# Altium PCB SoM.PcbDoc (part 5 of 5)
Units mm, origin at the board's own origin, x right, y up, seen from the top; angles counter-clockwise.
Board outline 69.6 x 50 mm, 8 copper layers ([1] Signal HS-H, [2] GND, [3] Signal HS-V, [4] GND, [5] POWER, [6] Signal H, [7] GND, [8] Signal V), stack 1.601 mm thick; 537 components, 538 nets, 5734 pads, 0 vias.
Unrouted connection lines stored in the file: 2195.
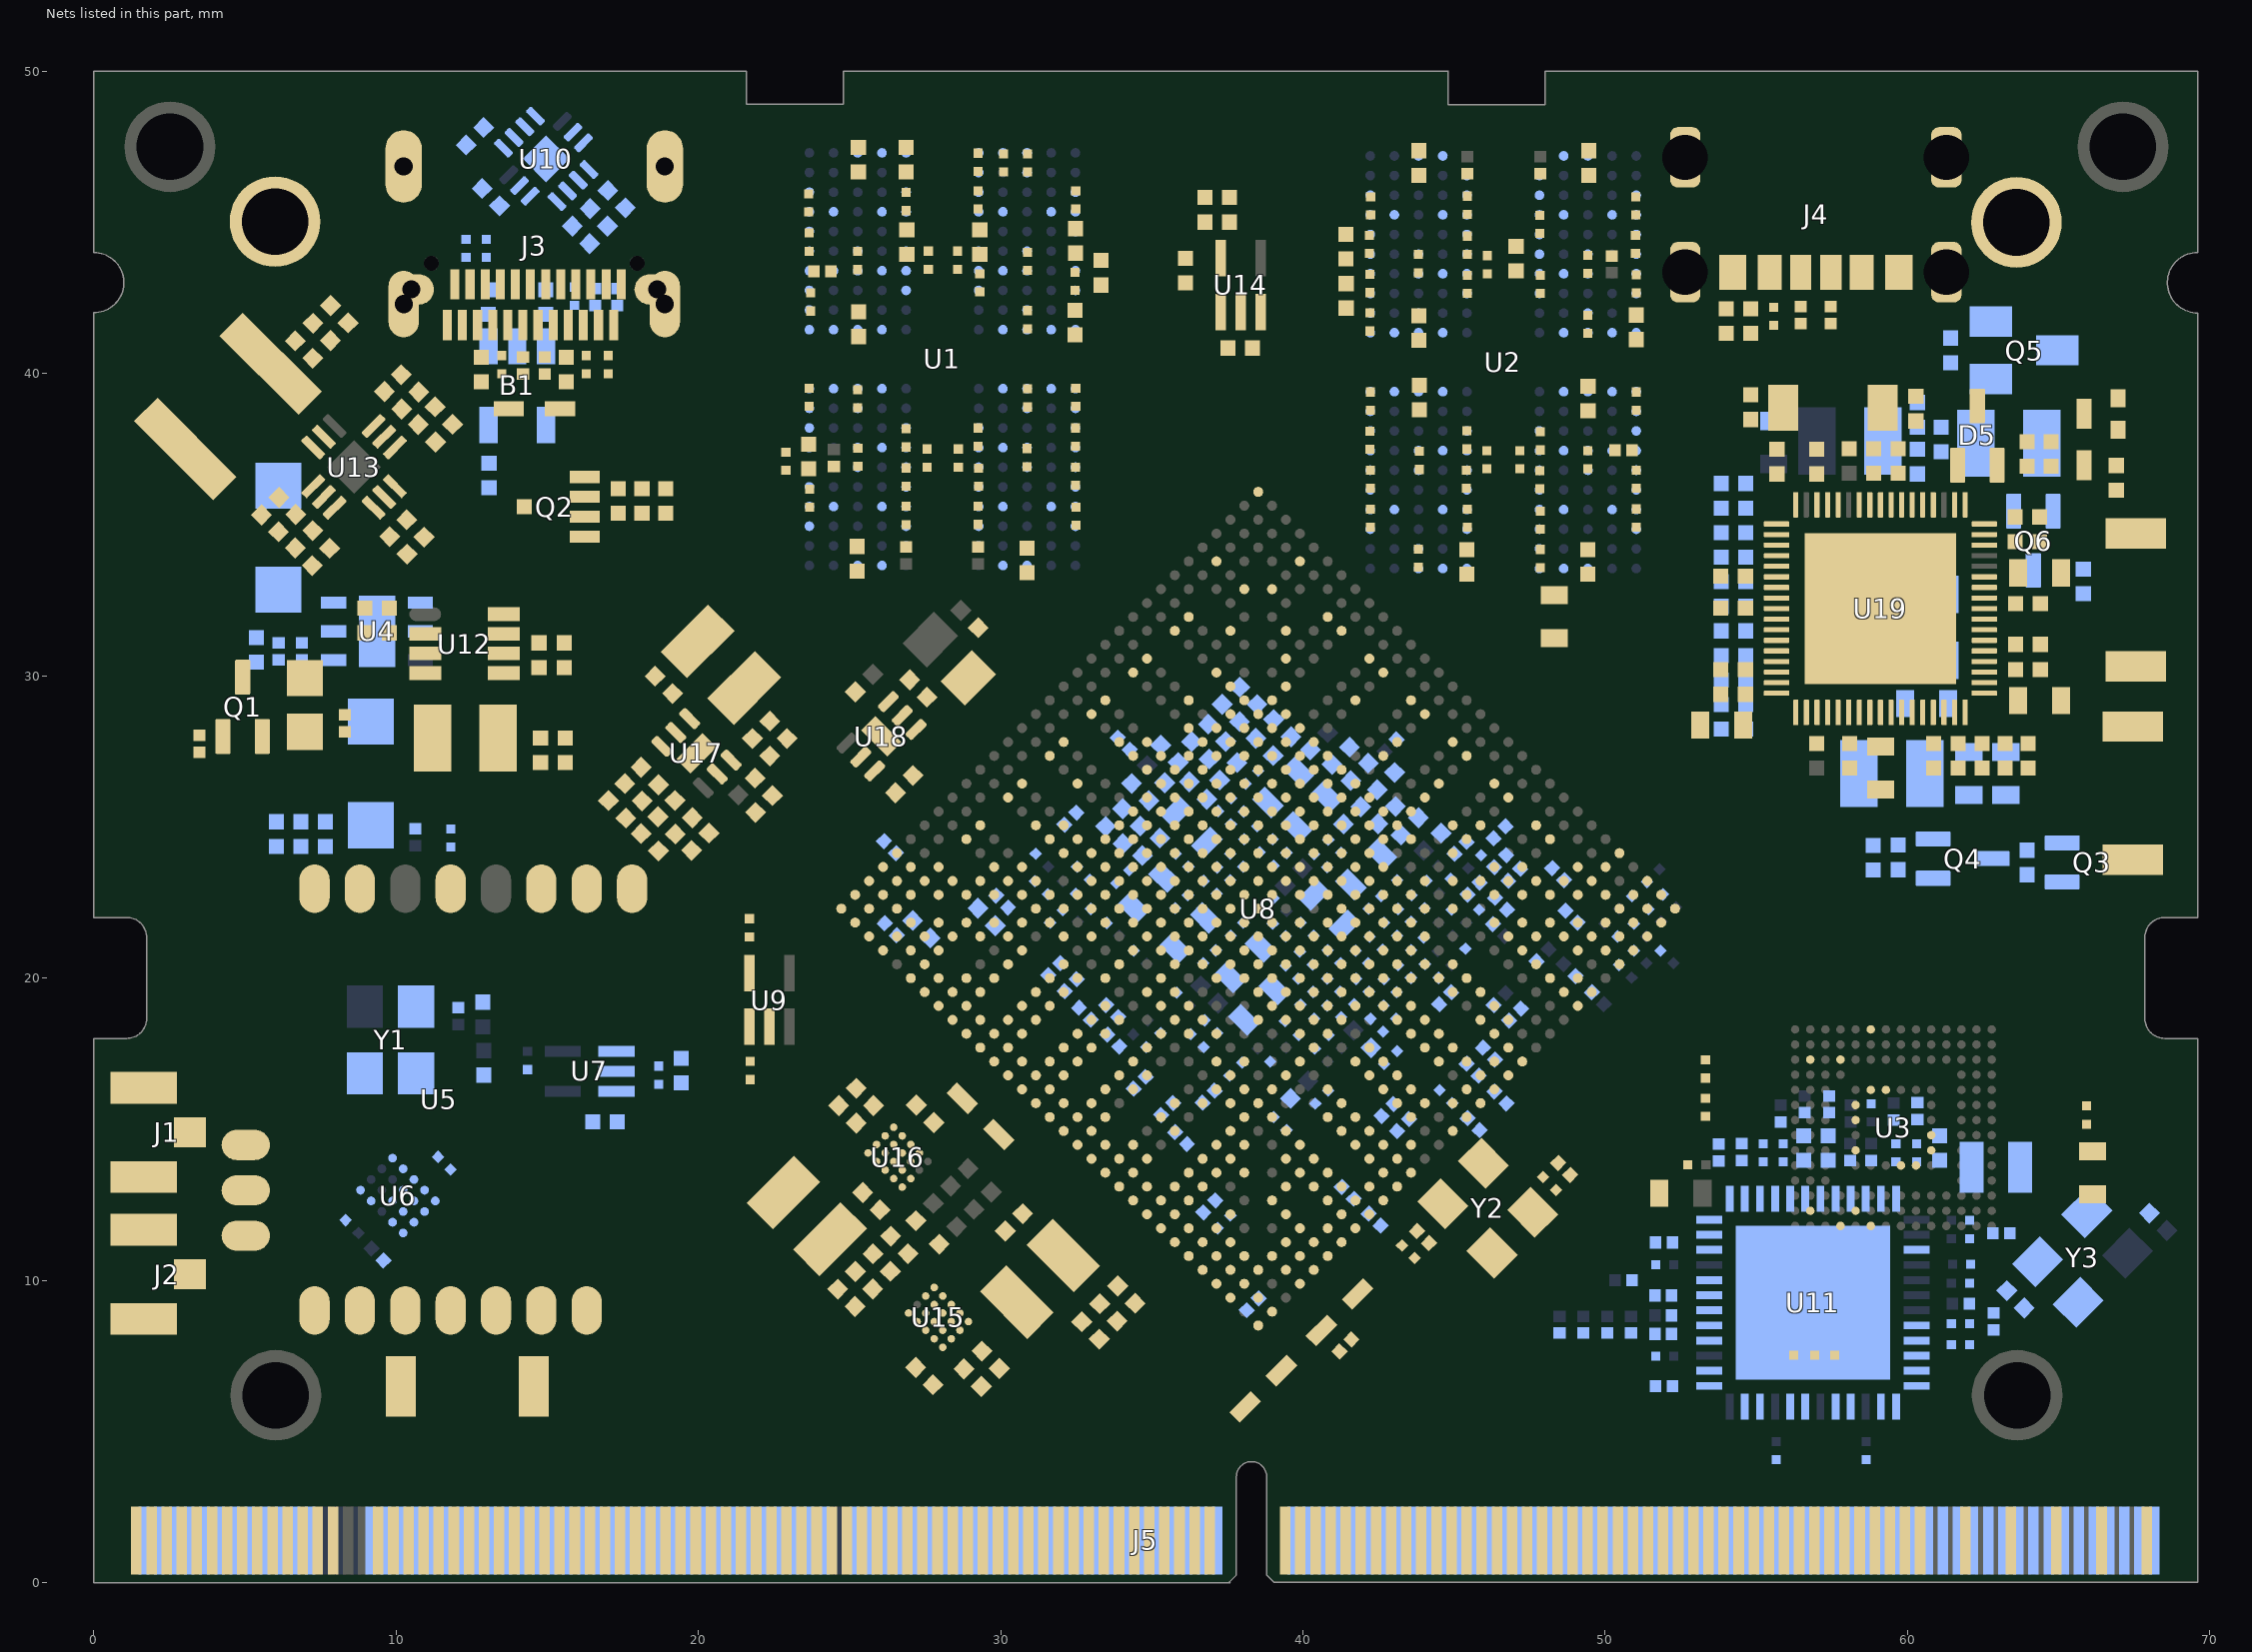
[diagram p11: the nets of this part, all layers, seen from the top]

## Nets (pads, with @x,y where several pads share a name; then routed paths per layer and width w, separated by ;. In a path a pad name is that pad's centre, name@x,y a point inside that pad or via, vN(x,y) a via of type N, cw(c..) or ccw(c..) an arc to the next point about the centre after c; other vN are vias at no path point) (continued)
GND: B1.2 C1.1 C2.1 C3.1 C4.1 C5.1 C6.1 C7.1 C8.1 C9.1 C10.1 C11.1 C12.1 C13.1 C14.1 C15.1 C16.1 C17.1 C18.1 C19.1 C20.1 C21.1 C22.1 C23.1 C24.1 C25.1 C26.1 C27.1 C28.1 C29.1 C30.1 C31.1 C32.1 C33.1 C34.1 C35.1 C36.1 C37.1 C38.1 C39.1 C40.1 C41.1 C42.1 C43.1 C44.1 C45.1 C46.1 C47.1 C48.1 C49.1 C50.1 C51.1 C52.1 C53.1 C54.1 C55.1 C56.1 C57.1 C58.1 C59.1 C60.1 C61.1 C62.1 C63.1 C64.1 C65.1 C66.1 C67.1 C68.1 C69.1 C70.1 C71.1 C72.1 C73.1 C74.1 C75.1 C76.1 C77.1 C78.1 C79.1 C80.1 C81.1 C82.1 C83.1 C84.1 C85.1 C86.1 C87.1 C88.1 C89.1 C90.1 C91.2 C92.2 C93.1 C94.1 C95.1 C96.2 C97.1 C98.1 C99.1 C100.1 C101.1 C102.1 C103.1 C104.1 C105.1 C106.1 C107.1 C108.1 C109.1 C110.1 C111.1 C112.1 C113.1 C114.1 C116.1 C117.1 C118.1 C119.1 C120.1 C121.1 C122.1 C123.1 C124.1 C125.1 C126.1 C127.1 C128.1 C129.1 C130.1 C131.1 C132.1 C133.1 C134.1 C135.1 C136.1 C137.1 C138.1 C139.1 C140.1 C141.1 C142.1 C143.1 C144.1 C145.1 C146.1 C154.1 C155.1 C156.1 C157.1 C158.1 C159.1 C160.1 C161.1 C162.1 C163.1 C164.1 C165.1 C166.1 C167.1 C168.1 C169.1 C170.1 C171.1 C172.1 C173.1 C174.1 C175.1 C176.1 C177.1 C178.1 C179.1 C180.1 C181.1 C182.1 C183.1 C184.1 C185.1 C186.1 C187.1 C188.1 C189.1 C190.1 C191.1 C192.1 C193.1 C194.1 C203.1 C204.1 C205.1 C206.1 C207.1 C208.1 C209.1 C210.1 C211.1 C212.1 C213.1 C214.1 C215.1 C216.1 C217.1 C218.1 C219.1 C220.1 C221.1 C222.1 C223.1 C224.1 C225.1 C226.1 C227.1 C228.1 C229.1 C230.1 C231.1 C232.1 C233.2 C234.1 C235.1 C236.1 C241.1 C243.1 C245.1 C246.1 C247.1 C248.1 C249.1 C250.1 C251.1 C252.1 C253.1 C254.1 C255.1 C256.1 C257.1 C258.1 C259.1 C260.1 C261.1 C262.1 C263.1 C264.1 C265.1 C266.1 C267.1 C268.1 C270.1 C271.1 C272.1 C273.1 C274.1 C275.1 C277.1 C278.1 C279.1 C280.1 C281.1 C282.1 C283.1 C284.1 C285.1 C286.1 C287.1 C288.1 C289.1 C290.1 C291.1 C292.1 C293.1 C294.1 C295.1 C296.1 C297.1 C298.1 C299.1 C300.1 C301.1 C302.1 C303.1 C304.1 C305.1 C306.1 C307.1 C308.1 C309.1 C310.1 C311.1 C312.1 C313.1 C314.1 C315.1 C316.1 C317.1 C318.1 C319.1 C320.1 C322.1 C323.1 C324.1 C325.1 C326.1 C327.1 C328.2 C329.1 C330.1 C331.1 C332.1 C333.1 C334.1 C335.1 C336.1 C337.1 C338.1 C339.1 C340.1 C341.2 C342.1 C343.2 C344.1 C345.1 C346.1 C347.1 D1.A D2.A D3.A D4.A D7.A J1.1 J1.3 J2.1 J2.3 J3.A1 J3.A12 J3.B1 J3.B12 J3.S1 J3.S2 J3.S3 J3.S4 J4.A12 J4.B12 J4.E1 J4.E2 J4.E3 J4.E4 J5.9 J5.10 J5.11 J5.12 J5.24 J5.32 J5.35 J5.51 J5.64 J5.65 J5.74 J5.83 J5.86 J5.87 J5.92 J5.96 J5.109 J5.110 J5.113 J5.114 J5.119 J5.120 J5.125 J5.126 J5.131 J5.132 J5.137 J5.138 J5.143 J5.144 J5.146 J5.149 J5.152 J5.155 J5.158 J5.161 J5.164 J5.167 J5.170 J5.173 J5.176 J5.179 J5.182 J5.185 J5.188 J5.191 J5.194 J5.197 J5.200 J5.203 J5.206 J5.209 J5.212 J5.217 J5.218 J5.223 J5.224 J5.229 J5.230 J5.235 J5.236 J5.241 J5.242 J5.247 J5.248 J5.253 J5.254 J5.259 J5.260 pad.1@6,45.025 pad.1@63.6,45 Q1.2 Q4.2 Q6.2 R2.1 R6.1 R13.2 R17.1 R18.2 R19.1 R20.1 R26.1 R28.2 R29.2 R30.1 R31.2 R32.2 R33.2 R34.2 R35.2 R37.2 R39.2 R40.2 R41.2 R52.1 R53.1 R64.2 R65.1 R66.1 R75.1 R81.1 R83.1 R85.1 R87.1 R95.1 R99.1 R101.1 R102.1 R103.1 R114.1 R115.1 R116.1 R120.1 R121.1 R131.1 SW2.1 SW3.1 U1.A3 U1.A10 U1.AB3 U1.AB5 U1.AB8 U1.AB10 U1.C1 U1.C5 U1.C8 U1.C12 U1.D2 U1.D4 U1.D9 U1.D11 U1.E1 U1.E5 U1.E8 U1.E12 U1.G1 U1.G3 U1.G5 U1.G8 U1.G10 U1.G12 U1.J1 U1.J3 U1.J10 U1.J12 U1.K2 U1.K4 U1.K9 U1.K11 U1.N2 U1.N4 U1.N9 U1.N11 U1.P1 U1.P3 U1.P10 U1.P12 U1.T1 U1.T3 U1.T5 U1.T8 U1.T10 U1.T12 U1.V1 U1.V5 U1.V8 U1.V12 U1.W2 U1.W4 U1.W9 U1.W11 U1.Y1 U1.Y5 U1.Y8 U1.Y12 U2.A3 U2.A10 U2.AB3 U2.AB5 U2.AB8 U2.AB10 U2.C1 U2.C5 U2.C8 U2.C12 U2.D2 U2.D4 U2.D9 U2.D11 U2.E1 U2.E5 U2.E8 U2.E12 U2.G1 U2.G3 U2.G5 U2.G8 U2.G10 U2.G12 U2.J1 U2.J3 U2.J10 U2.J12 U2.K2 U2.K4 U2.K9 U2.K11 U2.N2 U2.N4 U2.N9 U2.N11 U2.P1 U2.P3 U2.P10 U2.P12 U2.T1 U2.T3 U2.T5 U2.T8 U2.T10 U2.T12 U2.V1 U2.V5 U2.V8 U2.V12 U2.W2 U2.W4 U2.W9 U2.W11 U2.Y1 U2.Y5 U2.Y8 U2.Y12 U3.A6 U3.C4 U3.E7 U3.G5 U3.H10 U3.J5 U3.K8 U3.N2 U3.N5 U3.P4 U3.P6 U4.2 U4.7 U5.5 U5.7 U5.8 U5.10 U5.14 U6.D1 U7.2 U8.A1 U8.A27 U8.A31 U8.AA3 U8.AA5 U8.AA9 U8.AA10 U8.AA11 U8.AA12 U8.AA13 U8.AA14 U8.AA15 U8.AA23 U8.AA26 U8.AA29 U8.AB9 U8.AB10 U8.AB11 U8.AB13 U8.AB15 U8.AB16 U8.AB17 U8.AB19 U8.AB23 U8.AC3 U8.AC11 U8.AC13 U8.AC15 U8.AC16 U8.AC17 U8.AC18 U8.AC20 U8.AC21 U8.AC22 U8.AC23 U8.AC25 U8.AC26 U8.AC29 U8.AD3 U8.AD5 U8.AD10 U8.AD13 U8.AD17 U8.AD21 U8.AD22 U8.AD26 U8.AD29 U8.AE11 U8.AE12 U8.AE14 U8.AE17 U8.AE23 U8.AE27 U8.AF9 U8.AF17 U8.AF18 U8.AF20 U8.AF23 U8.AF24 U8.AF29 U8.AG2 U8.AG29 U8.AH29 U8.AJ5 U8.AJ6 U8.AJ8 U8.AJ9 U8.AJ11 U8.AJ12 U8.AJ14 U8.AJ15 U8.AJ17 U8.AJ18 U8.AJ20 U8.AJ21 U8.AJ23 U8.AJ24 U8.AJ26 U8.AJ27 U8.AJ28 U8.AJ29 U8.AL1 U8.AL31 U8.B5 U8.B31 U8.C8 U8.C9 U8.C11 U8.C12 U8.C14 U8.C15 U8.C17 U8.C18 U8.C20 U8.C21 U8.C23 U8.C24 U8.C26 U8.C28 U8.C29 U8.D5 U8.D29 U8.E2 U8.E4 U8.E7 U8.E12 U8.E15 U8.E18 U8.E21 U8.E24 U8.E31 U8.F8 U8.F15 U8.F18 U8.F20 U8.F21 U8.G5 U8.G9 U8.G18 U8.G27 U8.H3 U8.H9 U8.H10 U8.H11 U8.H12 U8.H13 U8.H15 U8.H16 U8.H17 U8.H18 U8.H19 U8.H26 U8.J3 U8.J6 U8.J7 U8.J8 U8.J9 U8.J10 U8.J21 U8.K8 U8.K9 U8.K10 U8.K12 U8.K14 U8.K16 U8.K18 U8.K20 U8.K22 U8.L3 U8.L6 U8.L8 U8.L11 U8.L12 U8.L13 U8.L14 U8.L15 U8.L16 U8.L20 U8.L22 U8.L27 U8.M3 U8.M8 U8.M10 U8.M16 U8.M23 U8.N8 U8.N13 U8.N14 U8.N15 U8.N16 U8.N17 U8.N19 U8.N21 U8.P3 U8.P6 U8.P7 U8.P8 U8.P10 U8.P11 U8.P12 U8.P16 U8.P17 U8.P19 U8.P21 U8.R3 U8.R5 U8.R6 U8.R14 U8.R15 U8.R16 U8.R18 U8.R21 U8.R23 U8.T8 U8.T10 U8.T16 U8.T18 U8.T19 U8.T21 U8.U3 U8.U8 U8.U11 U8.U12 U8.U14 U8.U15 U8.U16 U8.U19 U8.U21 U8.U22 U8.U23 U8.U29 U8.V3 U8.V5 U8.V8 U8.V10 U8.V17 U8.V23 U8.W8 U8.W9 U8.W13 U8.W17 U8.W18 U8.W19 U8.W21 U8.W22 U8.W23 U8.W30 U8.Y3 U8.Y9 U8.Y10 U8.Y11 U8.Y12 U8.Y13 U8.Y14 U8.Y15 U8.Y16 U8.Y17 U8.Y20 U8.Y23 U8.Y29 U9.2 U10.9 U10.15 U11.47 U11.49 U12.4 U12.6 U13.2 U13.10 U14.2 U15.B2 U15.B3 U15.B4 U15.C1 U15.C2 U15.C3 U15.C4 U16.B2 U16.B3 U16.B4 U16.C1 U16.C2 U16.C3 U16.C4 U17.5 U17.7 U18.5 U18.7 U19.21 U19.22 U19.27 U19.28 U19.30 U19.38 U19.40 U19.41 U19.46 U19.57 U19.62 U19.64 U19.69 Y1.2 Y2.2 Y2.4 Y3.2 Y3.4
GPIO0_A2: J5.37 U8.N24
GPIO0_A6/PWM3A_IR: J5.49 U8.P25
GPIO0_B5/LED1_OUT: R93.1 U8.P24
GPIO1_A0: J5.34 U8.R25
GPIO1_A1: J5.36 U8.T31
GPIO1_A2_CC_INT_L: U8.R26 U10.5
GPIO1_A3: J5.38 U8.R27
GPIO1_A4: J5.40 U8.R28
GPIO1_B5_TP_RST: J5.82 U8.M24
GPIO1_C2: J5.42 U8.N31
GPIO1_C4_TP_INT: J5.84 U8.M29
GPIO1_C6: J5.44 U8.L25
GPIO1_C7: J5.46 U8.M31
GPIO1_D0: J5.48 U8.L26
GPIO2_A2: J5.39 U8.H30
GPIO2_A3: J5.41 U8.F28
GPIO2_A4: J5.43 U8.H29
GPIO2_A5: J5.45 U8.F29
GPIO2_A6: J5.47 U8.H27
GPIO2_B3_CIF_CLKOUTA: J5.111 U8.H31
GPIO4_C0/I2C3_SDA: J5.68 U8.AG6
GPIO4_C1/I2C3_SCL: J5.66 U8.AL2
GPIO4_C5/SPDIF_TX: J5.50 U8.AK1
GPIO4_C6/PWM1: J5.90 U8.AL3
GPIO4_D0_PCB0: R47.1 R52.2 U8.AE6
GPIO4_D1_PCB1: R48.1 R53.2 U8.AK4
GPIO4_D2: B1.4 U8.AH3
GPIO4_D5_LCD_BL_EN: J5.78 U8.AJ3
GPIO4_D6_LCD_RST_H: J5.80 U8.AG4
GPU_SLEEP: U8.M25 U15.A1
H14_U8D: FB5.1 U8.H14
HDMI_CEC: J5.145 U8.AD7
HDMI_HPD: D1.K J5.147 R30.2 U8.AE15
HDMI_TX0_N: J5.157 U8.AL17
HDMI_TX0_P: J5.159 U8.AK17
HDMI_TX1_N: J5.163 U8.AL18
HDMI_TX1_P: J5.165 U8.AK18
HDMI_TX2_N: J5.169 U8.AL19
HDMI_TX2_P: J5.171 U8.AK19
HDMI_TXCLK_N: J5.151 U8.AL16
HDMI_TXCLK_P: J5.153 U8.AK16
HOST0_D_N: J5.221 U8.AB31
HOST0_D_P: J5.219 U8.AB30
HOST1_D_N: J5.227 U8.AA31
HOST1_D_P: J5.225 U8.AA30
HP_DET_H: J5.76 U8.AH5
I2C1_SCL: J5.53 R62.1 U8.Y6
I2C1_SDA: J5.55 R61.1 U8.AG1
I2C2_SCL: J5.59 R43.1 U8.H25
I2C2_SDA: J5.57 R42.1 U8.G31
I2C4_TPSCL: J5.70 R59.1 U8.P30 U10.6
I2C4_TPSDA: J5.72 R60.1 U8.P31 U10.7
I2C7_SCL_HDMI: J5.61 R45.1 U8.H28
I2C7_SDA_HDMI: J5.63 R44.1 U8.G30
I2C_SCL_PMIC: R57.1 U8.N30 U15.A3 U16.A3 U19.19
I2C_SDA_PMIC: R58.1 U8.M26 U15.B1 U16.B1 U19.18
I2S0_LRCK_RX: J5.69 U8.AF4
I2S0_LRCK_TX: J5.71 U8.AJ2
I2S0_SCLK: J5.67 U8.AG3
I2S0_SDI0: J5.73 U8.Y7
I2S0_SDI1SDO3: J5.75 U8.AE5
I2S0_SDI2SDO2: J5.77 U8.AA6
I2S0_SDI3SDO1: J5.79 U8.AH2
I2S0_SDO0: J5.81 U8.AH1
I2S1_LRCK_RX: J5.91 U8.AA7
I2S1_LRCK_TX: J5.93 U8.AJ1
I2S1_SCLK: J5.89 U8.AF3
I2S1_SDI0: J5.95 U8.AD6
I2S1_SDO0: J5.97 U8.AC6
I2S_CLK: J5.85 U8.AC7
LAN_LED0_AD0: J5.232 R80.1 U11.34
LAN_LED0_AD1: J5.234 R83.2 U11.35
LDO: C284.2 U13.6 U14.1 U14.3
LED2_RXDLY: R85.2 R86.1 U11.32
LOG_DVS_PWM: R117.1 R119.2 U8.M28
M7_U8E: FB4.1 U8.M7
MAC_COL: R84.1 U8.D27 U11.33
MAC_CRS: C255.2 R73.1 U8.B27 U11.29
MAC_MCLK: R54.2 R74.1
MAC_MDC: U8.E29 U11.30
MAC_MDIO: R71.1 U8.G26 U11.31
MAC_RXCLK: R76.1 U8.F25
MAC_RXD0: R88.1 U8.E26 U11.14
MAC_RXD1: R81.2 R82.1 U8.F27 U11.16
MAC_RXD2: R89.1 U8.E30 U11.17
MAC_RXD3: R91.1 U8.E25 U11.18
MAC_RXDV: R87.2 U8.C27 U11.13
MAC_RXER: R72.1 U8.F23 U11.20
MAC_TXCLK: R56.2 R79.1
MAC_TXD0: R50.2 U11.23
MAC_TXD1: R51.1 U11.24
MAC_TXD2: R46.2 U11.25
MAC_TXD3: R49.1 U11.26
MAC_TXEN: R55.1 U11.27
MDI0_N: J5.256 U11.2
MDI0_P: J5.258 U11.1
MDI1_N: J5.250 U11.5
MDI1_P: J5.252 U11.4
MDI2_N: J5.244 U11.8
MDI2_P: J5.246 U11.7
MDI3_N: J5.238 U11.11
MDI3_P: J5.240 U11.10
MIPI_CSI0_PWM: J5.101 U8.AF8
MIPI_CSI0_RST: J5.99 U8.AD9
MIPI_CSI1_PWN: J5.105 U8.V26
MIPI_CSI1_RST: J5.103 U8.U28
MIPI_RX0_CLK_N: J5.127 U8.AL13
MIPI_RX0_CLK_P: J5.129 U8.AK13
MIPI_RX0_D0_N: J5.139 U8.AL15
MIPI_RX0_D0_P: J5.141 U8.AK15
MIPI_RX0_D1_N: J5.133 U8.AL14
MIPI_RX0_D1_P: J5.135 U8.AK14
MIPI_RX0_D2_N: J5.121 U8.AL12
MIPI_RX0_D2_P: J5.123 U8.AK12
MIPI_RX0_D3_N: J5.115 U8.AL11
MIPI_RX0_D3_P: J5.117 U8.AK11
MIPI_TX0_CLK_N: J5.160 U8.AH12
MIPI_TX0_CLK_P: J5.162 U8.AG12
MIPI_TX0_D0_N: J5.172 U8.AH15
MIPI_TX0_D0_P: J5.174 U8.AG15
MIPI_TX0_D1_N: J5.166 U8.AH14
MIPI_TX0_D1_P: J5.168 U8.AG14
MIPI_TX0_D2_N: J5.154 U8.AH11
MIPI_TX0_D2_P: J5.156 U8.AG11
MIPI_TX0_D3_N: J5.148 U8.AH9
MIPI_TX0_D3_P: J5.150 U8.AG9
MIPI_TX1/RX1_CLK_N: J5.128 U8.AL8
MIPI_TX1/RX1_CLK_P: J5.130 U8.AK8
MIPI_TX1/RX1_D0_N: J5.116 U8.AL6
MIPI_TX1/RX1_D0_P: J5.118 U8.AK6
MIPI_TX1/RX1_D1_N: J5.122 U8.AL7
MIPI_TX1/RX1_D1_P: J5.124 U8.AK7
MIPI_TX1/RX1_D2_N: J5.134 U8.AL9
MIPI_TX1/RX1_D2_P: J5.136 U8.AK9
MIPI_TX1/RX1_D3_N: J5.140 U8.AL10
MIPI_TX1/RX1_D3_P: J5.142 U8.AK10
NetB1_1: B1.1 R64.1
NetC92_1: C92.1 R10.1 U5.12
NetC180_2: C180.2 R23.1 Y2.3
NetC191_2: C191.2 R27.1 U8.AH26
NetC195_1: C195.1 U8.B29
NetC196_1: C196.1 U8.A29
NetC197_1: C197.1 U8.B30
NetC198_1: C198.1 U8.A30
NetC199_1: C199.1 U8.C30
NetC200_1: C200.1 U8.C31
NetC201_1: C201.1 U8.D30
NetC202_1: C202.1 U8.D31
NetC237_2: C237.2 J3.A3
NetC238_2: C238.2 J3.A2
NetC239_2: C239.2 J3.B3
NetC240_2: C240.2 J3.B2
NetC252_2: C252.2 C253.2 R69.1
NetC264_2: C264.2 R90.1 Y3.3
NetC269_1: C269.1 L3.1 U13.7
NetC269_2: C269.2 R96.2
NetC273_2: C273.2 C274.2 C275.2 Q2.5 R98.2 U13.1
NetC276_2: C276.2 Q2.4 R97.2 R99.2
NetC280_2: C280.2 R104.1 U13.9
NetC303_2: C303.2 R109.2 U17.2
NetC306_2: C306.2 R117.2 R118.1 R120.2
NetC319_2: C319.2 C320.2 L9.1 U19.39
NetC321_1: C321.1 R121.2 R122.1 U19.56
NetC322_2: C322.2 C323.2 L11.1 U19.29
NetC328_1: C328.1 U19.37
NetC341_1: C341.1 U19.65 Y4.2
NetC343_1: C343.1 R123.2 Y4.1
NetD2_K: D2.K R36.1 U8.AK30
NetD3_K: D3.K R38.1 U8.AK31
NetDS1_A: DS1.A R92.1
NetDS1_K: DS1.K Q1.3
NetJ1_2: J1.2 U5.9
NetJ2_2: J2.2 U5.6
NetJ4_A5: J4.A5 R101.2
NetJ4_B5: J4.B5 R102.2
NetL1_1: L1.1 U11.48
NetL2_1: L2.1 U12.3
NetL4_1: L4.1 U15.D3 U15.D4 U15.E3 U15.E4
NetL5_1: L5.1 U16.D3 U16.D4 U16.E3 U16.E4
NetL6_1: L6.1 U17.4
NetL7_1: L7.1 U18.4
NetL8_1: L8.1 U19.61
NetL9_2: L9.2 U19.42 U19.43
NetL10_1: L10.1 U19.58
NetL11_2: L11.2 U19.25 U19.26
NetQ1_1: Q1.1 R93.2
NetQ3_1: Q3.1 Q4.3 R111.2
NetQ4_1: Q4.1 R113.2 R115.2
NetQ5_1: Q5.1 Q6.3 R130.2
NetR11_1: R11.1 R12.2 U4.5
NetR12_1: R12.1 R13.1
NetR14_1: R14.1 Y1.1
NetR15_2: R15.2 U6.D4
NetR16_1: R16.1 R17.2 U7.3
NetR24_1: R24.1 U8.V29
NetR25_1: R25.1 U8.L28
NetR26_2: R26.2 U8.L29
NetR28_1: R28.1 U8.AF15
NetR29_1: R29.1 U8.G21
NetR31_1: R31.1 U8.AF12
NetR32_1: R32.1 U8.AG18
NetR33_1: R33.1 U8.AE21
NetR34_1: R34.1 U8.AG21
NetR35_1: R35.1 U8.AG20
NetR37_1: R37.1 U8.AC31
NetR39_1: R39.1 U8.AC30
NetR40_1: R40.1 U8.AF14
NetR41_1: R41.1 U8.AF11
NetR46_1: R46.1 U8.F24
NetR49_2: R49.2 U8.H23
NetR50_1: R50.1 U8.D26
NetR51_2: R51.2 U8.G23
NetR54_1: R54.1 U8.G24
NetR55_2: R55.2 U8.H22
NetR56_1: R56.1 U8.E28
NetR74_2: R74.2 U11.46
NetR75_2: R75.2 U11.39
NetR76_2: R76.2 U11.19
NetR79_2: R79.2 U11.22
NetR94_1: R94.1 R95.2 U12.7
NetR96_1: R96.1 U13.8
NetR98_1: R98.1 U13.12
NetR100_2: R100.2 R103.2 U13.11
NetR104_2: R104.2 U13.3
NetR110_1: R110.1 R114.2 R118.2 U17.6
NetR112_1: R112.1 R116.2 U18.6
NetR123_1: R123.1 U19.66
NetR127_1: R127.1 R129.1 R131.2 U19.34
NetU19_4: U19.4 U19.32
OTP_OUT_H: R113.1 U8.P26
PCIE_REF_CLK_N: J5.226 U8.AD30
PCIE_REF_CLK_P: J5.228 U8.AD31
PCIE_RX0_N: J5.214 U8.AF31
PCIE_RX0_P: J5.216 U8.AF30
PCIE_RX1_N: J5.202 U8.AH31
PCIE_RX1_P: J5.204 U8.AH30
PCIE_RX2_N: J5.190 U8.AC28
PCIE_RX2_P: J5.192 U8.AC27
PCIE_RX3_N: J5.178 U8.AF28
PCIE_RX3_P: J5.180 U8.AF27
PCIE_TX0_N: J5.220 U8.AE31
PCIE_TX0_P: J5.222 U8.AE30
PCIE_TX1_N: J5.208 U8.AG31
PCIE_TX1_P: J5.210 U8.AG30
PCIE_TX2_N: J5.196 U8.AA28
PCIE_TX2_P: J5.198 U8.AA27
PCIE_TX3_N: J5.184 U8.AD28
PCIE_TX3_P: J5.186 U8.AD27
PMIC_EXT_EN: R100.1 U12.8 U18.2 U19.55
PMIC_INT_L: C344.2 U8.M30 U19.49
PMIC_SLEEP_H: C345.2 Q6.1 U8.R30 U19.50
PWM0_BL: J5.88 U8.AF5
PWR_KEY: J5.14 R128.1 SW3.2
PWR_KEY_L: D6.A U8.V27
PWROM: D6.K D7.K R125.1 R128.2 U19.51
R7_U8E: R19.2 U8.R7
R8_U8E: FB3.1 U8.R8
R24_RK3399: C181.2 C182.2 FB7.1 U8.R24 U8.U25
RECOVERY: J5.20 R27.2 SW2.2
RESET_IN_H: C346.2 J5.22 Q3.3 SW1.2 U19.6
RespWROM: R22.1 R124.1 U19.20
RTC_BATT_IN: D5.A1 J5.18
RTC_CLKO_SOC: R126.1 U8.U31 U19.68
RTC_CLKO_WIFI: U5.16 Y1.3
SBU1: C242.2 J3.A8 R65.2 R68.2
SBU2: C244.2 J3.B8 R66.2 R67.2
SDIO0_CLK: J5.112 U8.AF7
SDIO0_CMD: J5.106 U8.AH6
SDIO0_D0: J5.98 U8.AD8
SDIO0_D1: J5.100 U8.AK5
SDIO0_D2: J5.102 U8.AG7
SDIO0_D3: J5.104 U8.AE8
SDIO0_DETN: J5.108 U8.AL4
SDIO_CLK: U5.17 U6.E4
SDIO_CMD: U5.4 U6.A3
SDIO_D0: U5.3 U6.A4
SDIO_D1: U5.2 U6.B3
SDIO_D2: U5.1 U6.B4
SDIO_D3: U5.18 U6.C3
SDMMC0_CLK: R24.2 U6.E1
SDMMC0_CMD: U6.A2 U8.V25
SDMMC0_D0: U6.A1 U8.Y27
SDMMC0_D1: U6.B2 U8.Y26
SDMMC0_D2: U6.B1 U8.Y28
SDMMC0_D3: U6.C2 U8.U27
SDMMC0_DET_L: R18.1 U8.V28
SDMMC0_VDDPST: C189.2 U8.U26
SPI1_CLK: J5.62 U8.P28
SPI1_CSn0: J5.56 U8.P29
SPI1_RXD/UART4_RX: J5.60 U8.P27
SPI1_TXD/UART4_TX: J5.58 U8.R31
T2_U1: R2.2 U1.T2
T2_U2: R6.2 U2.T2
T30_RK3399: C178.2 R22.2 U8.T30
TYPEC0_D_N: J3.A7 J3.B7 U8.AH23
TYPEC0_D_P: J3.A6 J3.B6 U8.AG23
TYPEC0_RX1_N: J3.B10 U8.AL21
TYPEC0_RX1_P: J3.B11 U8.AK21
TYPEC0_RX2_N: J3.A10 U8.AL23
TYPEC0_RX2_P: J3.A11 U8.AK23
TYPEC0_SBU1_DC_N: R67.1 U8.AG17
TYPEC0_SBU1_DC_P: R68.1 U8.AH17
TYPEC0_SBU1_N: C244.1 U8.AL20
TYPEC0_SBU1_P: C242.1 U8.AK20
TYPEC0_TX1_N: C237.1 U8.AK22
TYPEC0_TX1_P: C238.1 U8.AL22
TYPEC0_TX2_N: C239.1 U8.AK24
TYPEC0_TX2_P: C240.1 U8.AL24
TYPEC0_U2VBUSDET: D4.K R36.2 R63.1
TYPEC1_D_N: J5.177 U8.AH24
TYPEC1_D_P: J5.175 U8.AG24
TYPEC1_RX1_N: J5.189 U8.AL25
TYPEC1_RX1_P: J5.187 U8.AK25
TYPEC1_RX2_N: J5.201 U8.AL27
TYPEC1_RX2_P: J5.199 U8.AK27
TYPEC1_SBU1: J5.205 U8.AK29
TYPEC1_SBU1_DC: J5.211 U8.AE24
TYPEC1_SBU2: J5.207 U8.AL29
TYPEC1_SBU2_DC: J5.213 U8.AF25
TYPEC1_TX1_N: J5.183 U8.AK26
TYPEC1_TX1_P: J5.181 U8.AL26
TYPEC1_TX2_N: J5.195 U8.AK28
TYPEC1_TX2_P: J5.193 U8.AL28
TYPEC1_U2VBUSDET: J5.215 R38.2
TYPEC_CC1: C235.2 J3.A5 U10.10 U10.11
TYPEC_CC2: C236.2 J3.B5 U10.1 U10.14
UART2DBG_RX: J5.54 U8.AK2
UART2DBG_TX: J5.52 U8.AJ4
VBUS_TYPEC: B1.3 C231.2 C232.2 C241.2 J3.A4 J3.A9 J3.B4 J3.B9 R63.2 U10.2
VCC: R47.2 R48.2
VCC1V8_LPDDR4_A: C37.2 C38.2 C39.2 C40.2 C41.2 C42.2 C43.2 C44.2 C45.2 FB1.2 U1.F1 U1.F12 U1.G4 U1.G9 U1.T4 U1.T9 U1.U1 U1.U12
VCC1V8_LPDDR4_B: C82.2 C83.2 C84.2 C85.2 C86.2 C87.2 C88.2 C89.2 C90.2 FB2.2 U2.F1 U2.F12 U2.G4 U2.G9 U2.T4 U2.T9 U2.U1 U2.U12
VCC3V3_S5: C281.2 C282.2 C283.2 C342.2 D5.A2 R125.2 U14.5 U19.52 U19.53
VCC5V_SYS: B1.5 C96.1 C233.1 C243.2 C265.2 C266.2 C270.2 C271.2 C272.2 J5.13 J5.15 J5.17 L3.2 R92.2 U4.1 U4.6 U10.12 U10.13 U12.2 U13.5
VCC7: C117.2 C120.2 C185.2 C234.2 C267.2 C268.2 C285.2 C286.2 C287.2 C288.2 C289.2 C290.2 C300.2 C301.2 C302.2 C307.2 C308.2 C309.2 C310.2 C311.2 C312.2 C329.2 C330.2 C331.2 C332.2 C333.2 C334.2 C335.2 C336.2 C339.2 J5.19 J5.21 J5.23 J5.25 J5.27 J5.33 L2.2 Q3.2 R16.2 R94.2 R111.1 R130.1 SW1.1 U6.C1 U7.1 U9.1 U10.4 U12.5 U15.D1 U15.D2 U15.E1 U15.E2 U16.D1 U16.D2 U16.E1 U16.E2 U17.3 U18.3 U19.1 U19.8 U19.10 U19.13 U19.16 U19.17 U19.23 U19.24 U19.35 U19.36 U19.44 U19.45 U19.59 U19.60
VCC_CENTER: C103.2 C104.2 C108.2 C109.2 C111.2 C112.2 C113.2 C114.2 U8.M11 U8.M12 U8.M13 U8.M14 U8.M15 U8.N11 U8.N12 U8.P13 U8.P14 U8.P15
VCC_CPU_B: C146.2 C154.2 C155.2 C156.2 C157.2 C158.2 C159.2 U8.K19 U8.K21 U8.L18 U8.L19 U8.L21 U8.L23 U8.M18 U8.M19 U8.M20 U8.M21 U8.M22 U8.N20 U8.N22
VCC_CPU_L: C116.2 C118.2 C122.2 C123.2 C124.2 C125.2 C126.2 U8.P20 U8.P22 U8.R19 U8.R20 U8.R22 U8.T20 U8.T22
VCC_DDR: C1.2 C2.2 C3.2 C5.2 C6.2 C7.2 C8.2 C9.2 C10.2 C19.2 C20.2 C21.2 C22.2 C23.2 C24.2 C25.2 C26.2 C27.2 C46.2 C47.2 C48.2 C49.2 C50.2 C51.2 C52.2 C53.2 C54.2 C64.2 C65.2 C66.2 C67.2 C68.2 C69.2 C70.2 C71.2 C72.2 C160.2 C161.2 C162.2 C163.2 C164.2 C165.2 C166.2 C167.2 C168.2 C169.2 C170.2 C171.2 C172.2 C173.2 C174.2 C175.2 C176.2 C177.2 C317.2 C321.2 FB1.1 FB2.1 FB4.2 FB6.2 L10.2 Q5.3 R122.2 U1.A4 U1.A9 U1.AB4 U1.AB9 U1.F5 U1.F8 U1.H1 U1.H5 U1.H8 U1.H12 U1.K1 U1.K3 U1.K10 U1.K12 U1.N1 U1.N3 U1.N10 U1.N12 U1.R1 U1.R5 U1.R8 U1.R12 U1.U5 U1.U8 U2.A4 U2.A9 U2.AB4 U2.AB9 U2.F5 U2.F8 U2.H1 U2.H5 U2.H8 U2.H12 U2.K1 U2.K3 U2.K10 U2.K12 U2.N1 U2.N3 U2.N10 U2.N12 U2.R1 U2.R5 U2.R8 U2.R12 U2.U5 U2.U8 U8.J11 U8.J12 U8.J13 U8.J14 U8.J15 U8.J16 U8.J17 U8.J18 U8.K11 U8.K13 U8.K15 U8.K17 U8.L9 U8.L10 U8.M9 U8.N9 U8.N10 U8.P9 U8.R9 U8.R10 U8.T9 U8.U9 U8.U10 U8.V9
VCC_DDRC: C4.2 C11.2 C12.2 C13.2 C14.2 C15.2 C16.2 C17.2 C18.2 C28.2 C29.2 C30.2 C31.2 C32.2 C33.2 C34.2 C35.2 C36.2 C55.2 C56.2 C57.2 C58.2 C59.2 C60.2 C61.2 C62.2 C63.2 C73.2 C74.2 C75.2 C76.2 C77.2 C78.2 C79.2 C80.2 C81.2 C347.2 Q5.2 R1.2 R3.2 R4.2 R5.2 R7.1 R8.1 U1.AA3 U1.AA5 U1.AA8 U1.AA10 U1.B3 U1.B5 U1.B8 U1.B10 U1.D1 U1.D5 U1.D8 U1.D12 U1.F3 U1.F10 U1.U3 U1.U10 U1.W1 U1.W5 U1.W8 U1.W12 U2.AA3 U2.AA5 U2.AA8 U2.AA10 U2.B3 U2.B5 U2.B8 U2.B10 U2.D1 U2.D5 U2.D8 U2.D12 U2.F3 U2.F10 U2.U3 U2.U10 U2.W1 U2.W5 U2.W8 U2.W12
VCC_EFUSE: C186.2 U8.AD23 U9.5
VCC_GPU: C127.2 C128.2 C129.2 C130.2 C131.2 C132.2 C133.2 C134.2 C135.2 C136.2 C137.2 U8.R11 U8.R12 U8.R13 U8.T11 U8.T12 U8.T13 U8.T14 U8.U13 U8.V11 U8.V12 U8.V13 U8.V14 U8.V15 U8.V16 U8.W10 U8.W11 U8.W12 U8.W14 U8.W15 U8.W16
VCC_IN_CONN: C276.1 C277.2 C278.2 C279.2 J4.A9 J4.B9 J5.1 J5.2 J5.3 J5.4 J5.5 J5.6 J5.7 J5.8 Q2.1 Q2.2 Q2.3 R97.1 R129.2
VCC_LOG: C138.2 C139.2 C140.2 C141.2 C142.2 C143.2 C144.2 C145.2 U8.L17 U8.M17 U8.T17 U8.U17 U8.U18 U8.U20 U8.V18 U8.V19 U8.V20 U8.V21 U8.V22 U8.W20
VCC_RTC: C340.2 D5.K U19.9
VCC_WIFI: C91.1 C93.2 C94.2 C95.2 R11.2 U4.4 U5.15
VCCA_1V8: C194.2 FB10.2 U8.AC24
VDC_ONOFF: J5.16 R127.2
VDD1V_RGMII: R77.1 R78.1
VDD_CPU_B: C295.2 C296.2 C297.2 C298.2 L5.2 R108.2
VDD_CPU_B_FB: R108.1 U8.N18 U16.A4
VDD_GPU: C292.2 C293.2 C294.2 L4.2 R107.2
VDD_GPU_FB: R107.1 U8.T15 U15.A4
VDD_LOG: C304.2 L6.2 R110.2
VDDI_FM: C110.2 U3.C2
VDDREG: C248.2 C249.2 C259.2 C260.2 C261.2 C262.2 L1.2 R77.2 R78.2 U11.28 U11.36 U11.44 U11.45
VLDO1: C313.2 J5.107 U19.31
VLDO2: C314.2 U19.33
VLDO3: C315.2 U19.3
VLDO4: C190.2 C324.2 U8.T23 U19.12
VLDO5: C325.2 U19.14
VLDO6: C223.2 C230.2 C326.2 U8.AC8 U8.N23 U19.2
VLDO7: C228.2 C316.2 R61.2 R62.2 U8.AA8 U8.Y8 U19.5
VLDO8: C224.2 C229.2 C327.2 R57.2 R58.2 R59.2 R60.2 R119.1 U8.AC9 U8.P23 U19.15
VSOUT1: C100.2 C101.2 C102.2 C212.2 C215.2 C218.2 C226.2 C337.2 U3.E6 U3.F5 U3.J10 U3.K9 U8.AB18 U8.AB21 U8.J23 U8.Y25 U19.7
VSOUT2: C338.2 U19.11
XIN_OSC_RK3399: C179.2 R21.2 U8.Y31 Y2.1
XOUT_OSC_RK3399: R21.1 R23.2 U8.Y30
pads on no net: J3. J5.94 U1.A1 U1.A2 U1.A11 U1.A12 U1.AA1 U1.AA12 U1.AB1 U1.AB2 U1.AB11 U1.AB12 U1.B1 U1.B12 U1.G11 U1.K5 U1.K8 U1.N5 U1.N8 U2.A1 U2.A2 U2.A11 U2.A12 U2.AA1 U2.AA12 U2.AB1 U2.AB2 U2.AB11 U2.AB12 U2.B1 U2.B12 U2.G11 U2.K5 U2.K8 U2.N5 U2.N8 U3.A1 U3.A2 U3.A7 U3.A8 U3.A9 U3.A10 U3.A11 U3.A12 U3.A13 U3.A14 U3.B1 U3.B7 U3.B8 U3.B9 U3.B10 U3.B11 U3.B12 U3.B13 U3.B14 U3.C1 U3.C3 U3.C5 U3.C7 U3.C8 U3.C9 U3.C10 U3.C11 U3.C12 U3.C13 U3.C14 U3.D1 U3.D2 U3.D3 U3.D4 U3.D12 U3.D13 U3.D14 U3.E1 U3.E2 U3.E3 U3.E5 U3.E8 U3.E9 U3.E10 U3.E12 U3.E13 U3.E14 U3.F1 U3.F2 U3.F3 U3.F10 U3.F12 U3.F13 U3.F14 U3.G1 U3.G2 U3.G3 U3.G10 U3.G12 U3.G13 U3.G14 U3.H1 U3.H2 U3.H3 U3.H12 U3.H13 U3.H14 U3.J1 U3.J2 U3.J3 U3.J12 U3.J13 U3.J14 U3.K1 U3.K2 U3.K3 U3.K6 U3.K7 U3.K10 U3.K12 U3.K13 U3.K14 U3.L1 U3.L2 U3.L3 U3.L12 U3.L13 U3.L14 U3.M1 U3.M2 U3.M3 U3.M7 U3.M8 U3.M9 U3.M10 U3.M11 U3.M12 U3.M13 U3.M14 U3.N1 U3.N3 U3.N6 U3.N7 U3.N8 U3.N9 U3.N10 U3.N11 U3.N12 U3.N13 U3.N14 U3.P1 U3.P2 U3.P7 U3.P8 U3.P9 U3.P10 U3.P11 U3.P12 U3.P13 U3.P14 U4.3 U5.11 U6.D2 U6.D3 U6.E2 U6.E3 U7.4 U8.A3 U8.A4 U8.A6 U8.A7 U8.AA19 U8.AA20 U8.AA22 U8.AA24 U8.AA25 U8.AB20 U8.AB22 U8.AB24 U8.AC12 U8.AC14 U8.AC19 U8.AD11 U8.AD12 U8.AD14 U8.AD15 U8.AD18 U8.AD19 U8.AD20 U8.AD24 U8.AD25 U8.AE9 U8.AE18 U8.AE20 U8.AE26 U8.AF21 U8.AG8 U8.AH8 U8.AH18 U8.AH20 U8.AH21 U8.AH27 U8.AJ30 U8.AJ31 U8.AL5 U8.AL30 U8.B2 U8.B4 U8.B6 U8.B7 U8.C1 U8.C3 U8.C4 U8.C5 U8.C6 U8.D1 U8.D2 U8.D3 U8.D6 U8.D11 U8.D12 U8.E3 U8.E11 U8.F3 U8.F4 U8.F7 U8.F9 U8.F14 U8.F17 U8.F30 U8.F31 U8.G6 U8.G8 U8.G14 U8.G17 U8.G20 U8.H6 U8.H7 U8.H21 U8.H24 U8.J1 U8.J2 U8.K1 U8.K2 U8.L4 U8.L5 U8.L30 U8.M4 U8.R29 U8.U6 U8.U7 U8.U30 U8.V6 U8.V7 U8.V30 U8.V31 U8.W31 U9.4 U10.3 U10.8 U11.12 U12.1 U13.4 U13.13 U14.4 U17.1 U18.1 U19.47 U19.48 U19.54 U19.67

## Polygon pours and split planes (outlines as drawn)
no net on [2] GND (split plane): 196 vertices, not listed, extent 0.511,0.51 69.09,49.494
no net on [3] Signal HS-V (split plane): 196 vertices, not listed, extent 0.511,0.51 69.09,49.494
no net on [4] GND (split plane): 196 vertices, not listed, extent 0.511,0.51 69.09,49.494
no net on [5] POWER (split plane): 196 vertices, not listed, extent 0.511,0.51 69.09,49.494
no net on [6] Signal H (split plane): 196 vertices, not listed, extent 0.511,0.51 69.09,49.494
no net on [7] GND (split plane): 196 vertices, not listed, extent 0.511,0.51 69.09,49.494

## Silkscreen, mask and mechanical layers (free items; w line width, h text height)
Mechanical 1:
  lines w0.013: 69.561,0.004 69.601,0.004 69.601,0.044
  lines w0.1: 0.001,44 0.001,45.404 0.001,49.004 ; 0.001,49.014 0.001,49.984 ; 0.008,44 cw(c0.008,43.008) 0.001,42.016 0.001,22.004 1.101,22.004 cw(c1.101,21.354) 1.751,21.354 1.751,18.654 cw(c1.101,18.654) 1.101,18.004 0.001,18.004 0.001,0 37.592,0 ; 0.021,50.004 1.001,50.004 21.596,50.004 21.596,48.902 24.799,48.902 24.799,50.004 44.799,50.004 ; 37.551,0.004 37.801,0.254 37.801,3.504 cw(c38.301,3.504) 38.301,4.004 cw(c38.301,3.504) 38.801,3.504 38.801,0.254 39.051,0.004 69.001,0.004 69.561,0.004 ; 44.801,50.002 44.801,48.894 48.004,48.894 48.004,50.004 68.601,50.004 69.601,50.004 69.601,49.004 69.601,45.404 69.601,44.002 ; 69.589,44.002 ccw(c69.589,43.004) 69.601,42.006 69.601,22.004 68.501,22.004 ccw(c68.501,21.354) 67.851,21.354 67.851,18.654 ccw(c68.501,18.654) 68.501,18.004 69.601,18.004 69.601,0.604 69.601,0.044
Mechanical 4:
  drawing of 665 lines, arcs and shapes, not listed
Mechanical 5:
  drawing of 521 lines, arcs and shapes, not listed
Mechanical 6:
  lines w0.013: 4.065,21.493 4.928,21.493 4.928,29.748 4.065,29.748 4.065,21.493 ; 4.09,37.012 4.954,37.012 4.954,42.879 cw(c5.524,44.397) 4.09,43.641 4.09,37.012 ; 4.115,7.65 cw(c5.55,6.894) 4.979,8.412 4.979,14.279 4.115,14.279 4.115,7.65 ; 4.319,49.458 cw(c3.76,48.375) 4.954,48.62 9.322,48.62 9.322,49.458 4.319,49.458 ; 16.536,48.975 21.083,48.975 21.083,49.483 16.536,49.483 16.536,48.975 ; 25.401,48.975 31.192,48.975 31.192,49.433 25.401,49.433 25.401,48.975 ; 38.304,48.975 44.095,48.975 44.095,49.433 38.304,49.433 38.304,48.975 ; 48.565,48.975 53.112,48.975 53.112,49.483 48.565,49.483 48.565,48.975 ; 60.275,48.594 60.275,49.433 65.279,49.433 ccw(c65.837,48.35) 64.644,48.594 60.275,48.594 ; 64.618,36.91 65.482,36.91 65.482,43.54 cw(c64.048,44.295) 64.618,42.778 64.618,36.91 ; 64.669,8.361 cw(c64.098,6.844) 65.533,7.599 65.533,14.228 64.669,14.228 64.669,8.361 ; 64.669,21.467 65.533,21.467 65.533,29.722 64.669,29.722 64.669,21.467
Mechanical 7:
  lines w0.013: 64.593,9.185 64.593,41.99 ccw(c63.591,42.005) 63.602,43.006 cw(c63.588,45) 63.602,46.994 ccw(c63.578,47.985) 63.602,48.975 48.565,48.975 48.565,49.483 65.583,49.483 65.583,4.322 65.456,4.195 63.628,4.195 cw(c63.602,6.176) 63.577,8.158 ccw(c63.566,9.185) 64.593,9.199 ; 4.014,4.297 4.014,32.415 cw(c3.265,31.706) 4.293,31.78 ccw(c5.026,31.852) 4.573,31.272 ccw(c5.614,31.881) 5.004,30.84 5.004,9.174 ccw(c6.032,9.159) 6.02,8.132 cw(c5.995,6.151) 5.97,4.17 4.141,4.17 4.014,4.297 ; 4.014,33.837 4.014,37.571 cw(c4.161,36.689) 5.004,36.987 5.004,33.151 ccw(c3.987,32.7) 4.039,33.812 4.014,33.837 ; 4.039,38.993 cw(c4.141,37.331) 5.03,38.739 5.03,41.965 cw(c6.031,41.979) 6.02,42.981 ccw(c6.035,44.975) 6.02,46.969 cw(c6.045,47.959) 6.02,48.95 21.057,48.95 21.057,49.458 4.039,49.458 4.039,38.993 ; 25.426,48.975 25.426,49.433 44.095,49.433 44.095,48.975 25.426,48.975
Mechanical 8:
  lines w0.013: 0.001,0.604 0.001,0.034 0.001,0.004 0.031,0.004 0.601,0.004 37.551,0.004 ; 0.001,44 0.008,44 ; 0.001,49.004 cw(c1.001,48.999) 0.001,49.014 0.001,49.014 ; 0.001,49.984 0.001,50.004 0.021,50.004 ; 44.799,50.004 44.801,50.002 ; 69.589,44.002 69.601,44.002

## Text inside footprints (layer, text, board x,y; h text height)
C91: Bottom Overlay "+" at 10.363,25.349 h0.4 r180
C96: Bottom Overlay "+" at 7.315,33.147 h0.4 r180
DS1: Top Overlay "A" at 6.81,27.045 h0.4 r270; Top Overlay "K" at 6.735,31.757 h0.4 r270
J5: [1] Signal HS-H "1" at 1.204,3.769 h0.4
U12: Top Overlay "1" at 9.941,31.724 h0.4